# Altium PCB PCB_ETCV1_1.PcbDoc
Units mm, origin at the board's own origin, x right, y up, seen from the top; angles counter-clockwise.
Board outline 48.26 x 48.89 mm, 4 copper layers (Top Layer, Int1, Int2, Bottom Layer), stack 1.369 mm thick; 49 components, 45 nets, 195 pads, 69 vias.
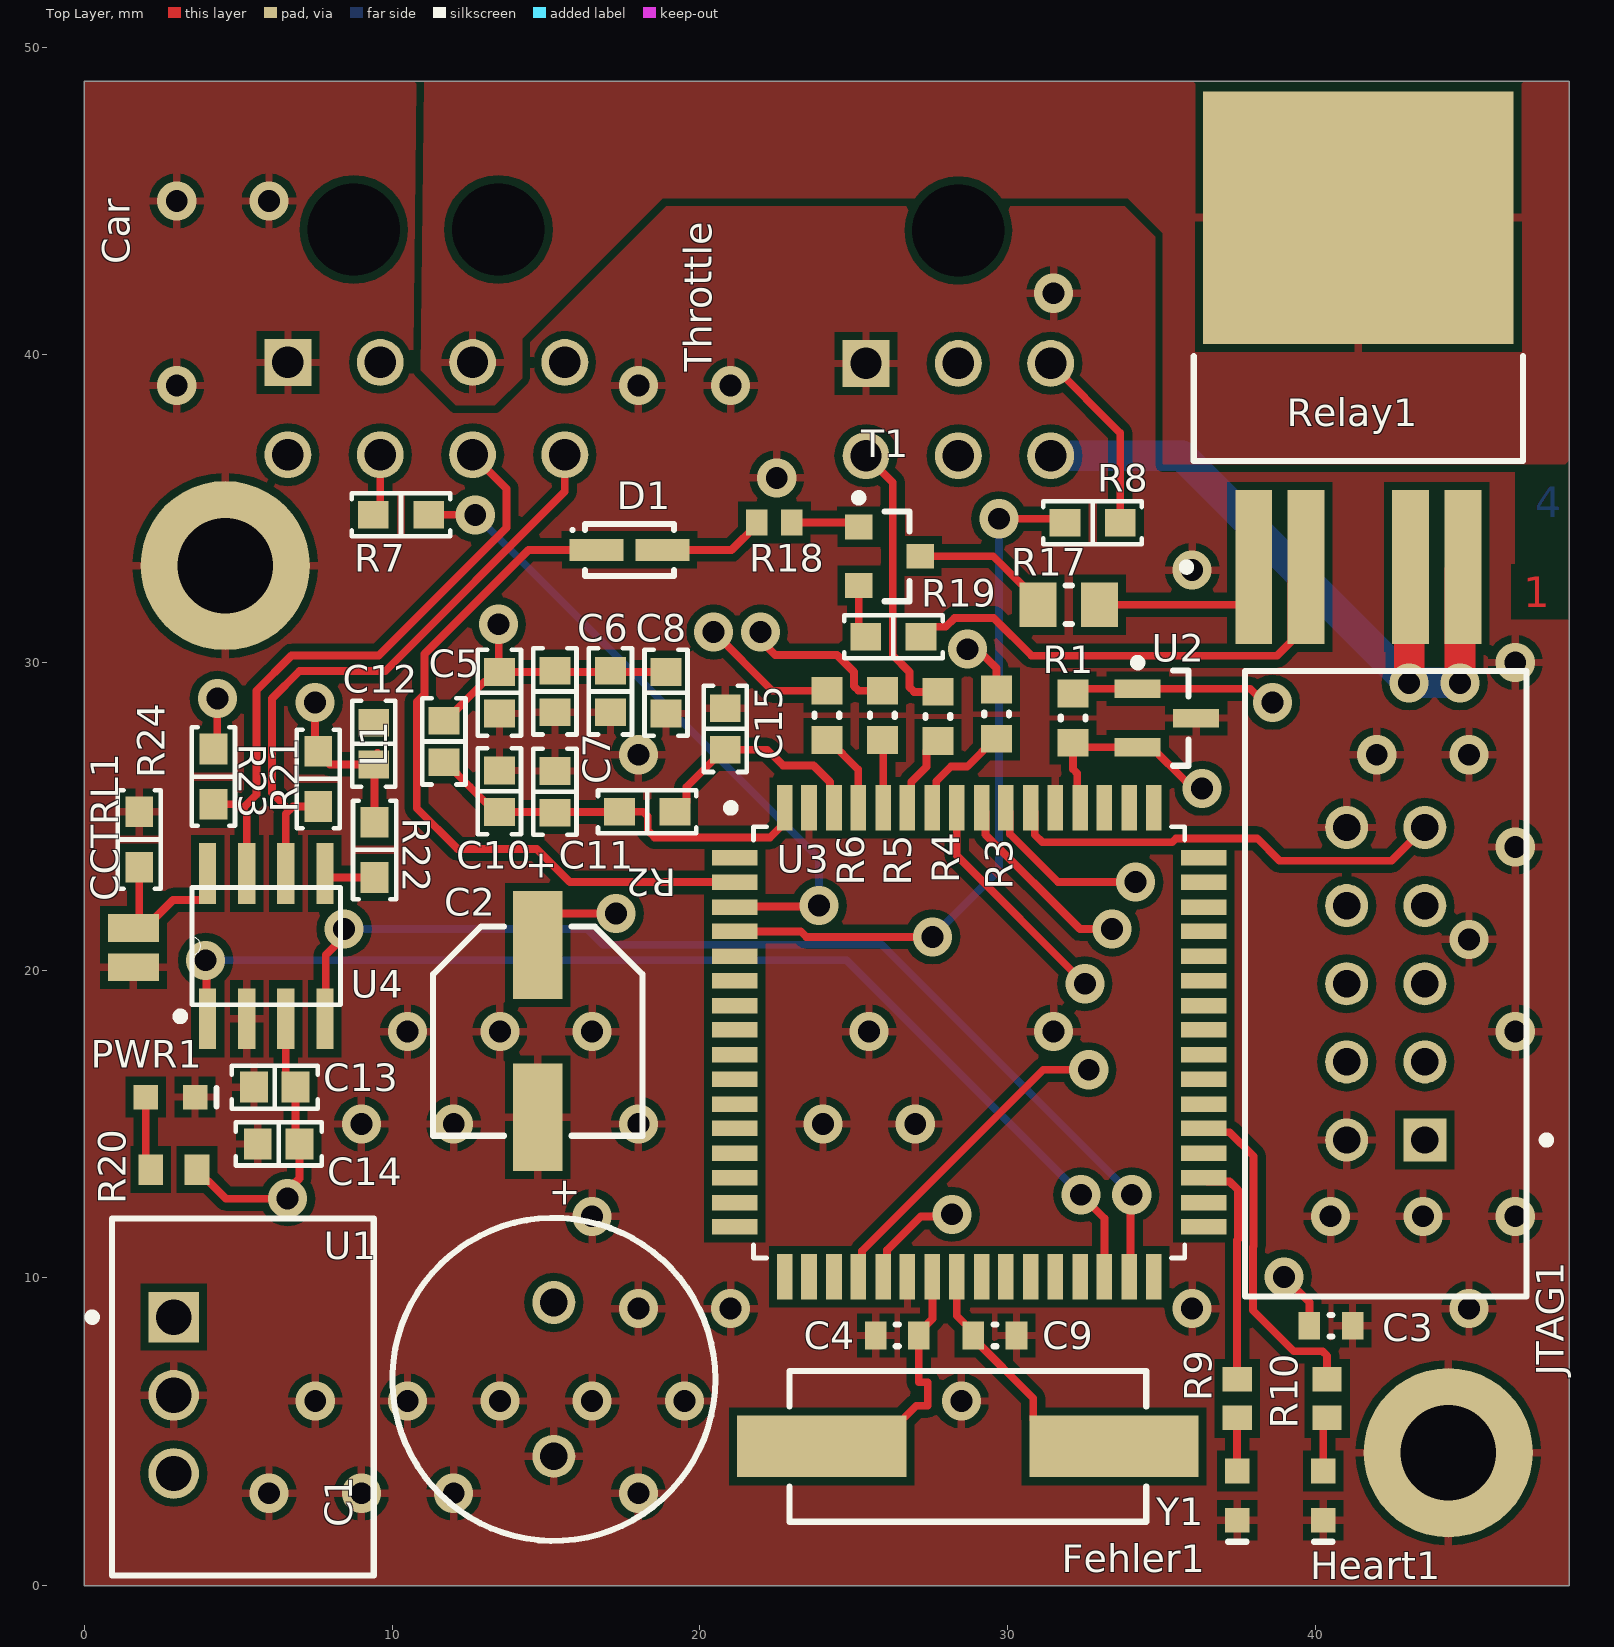
[diagram p0: Top Layer view]
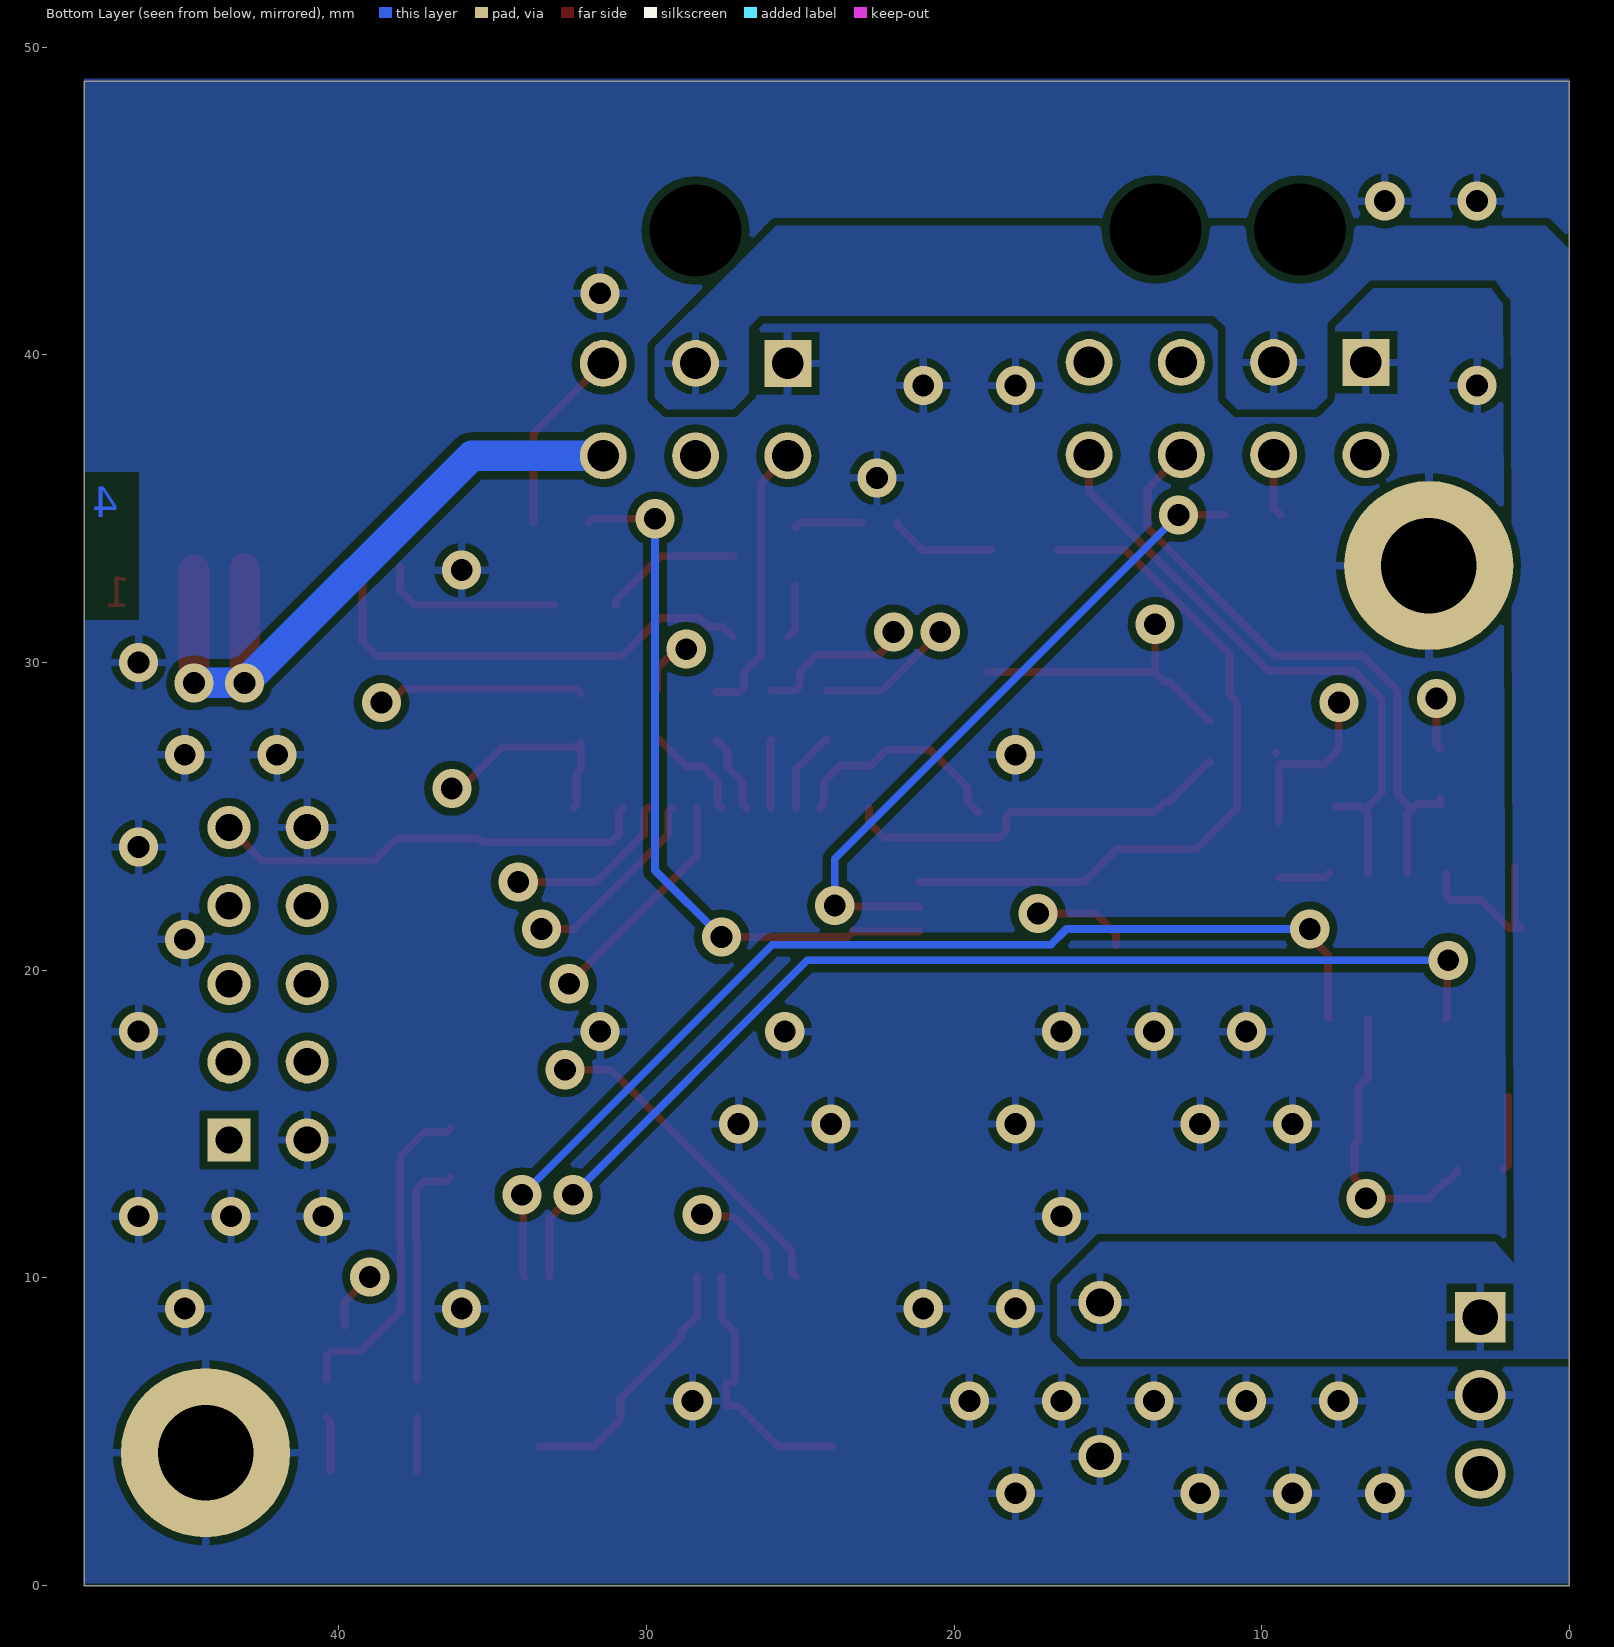
[diagram p1: Bottom Layer view, seen from below]
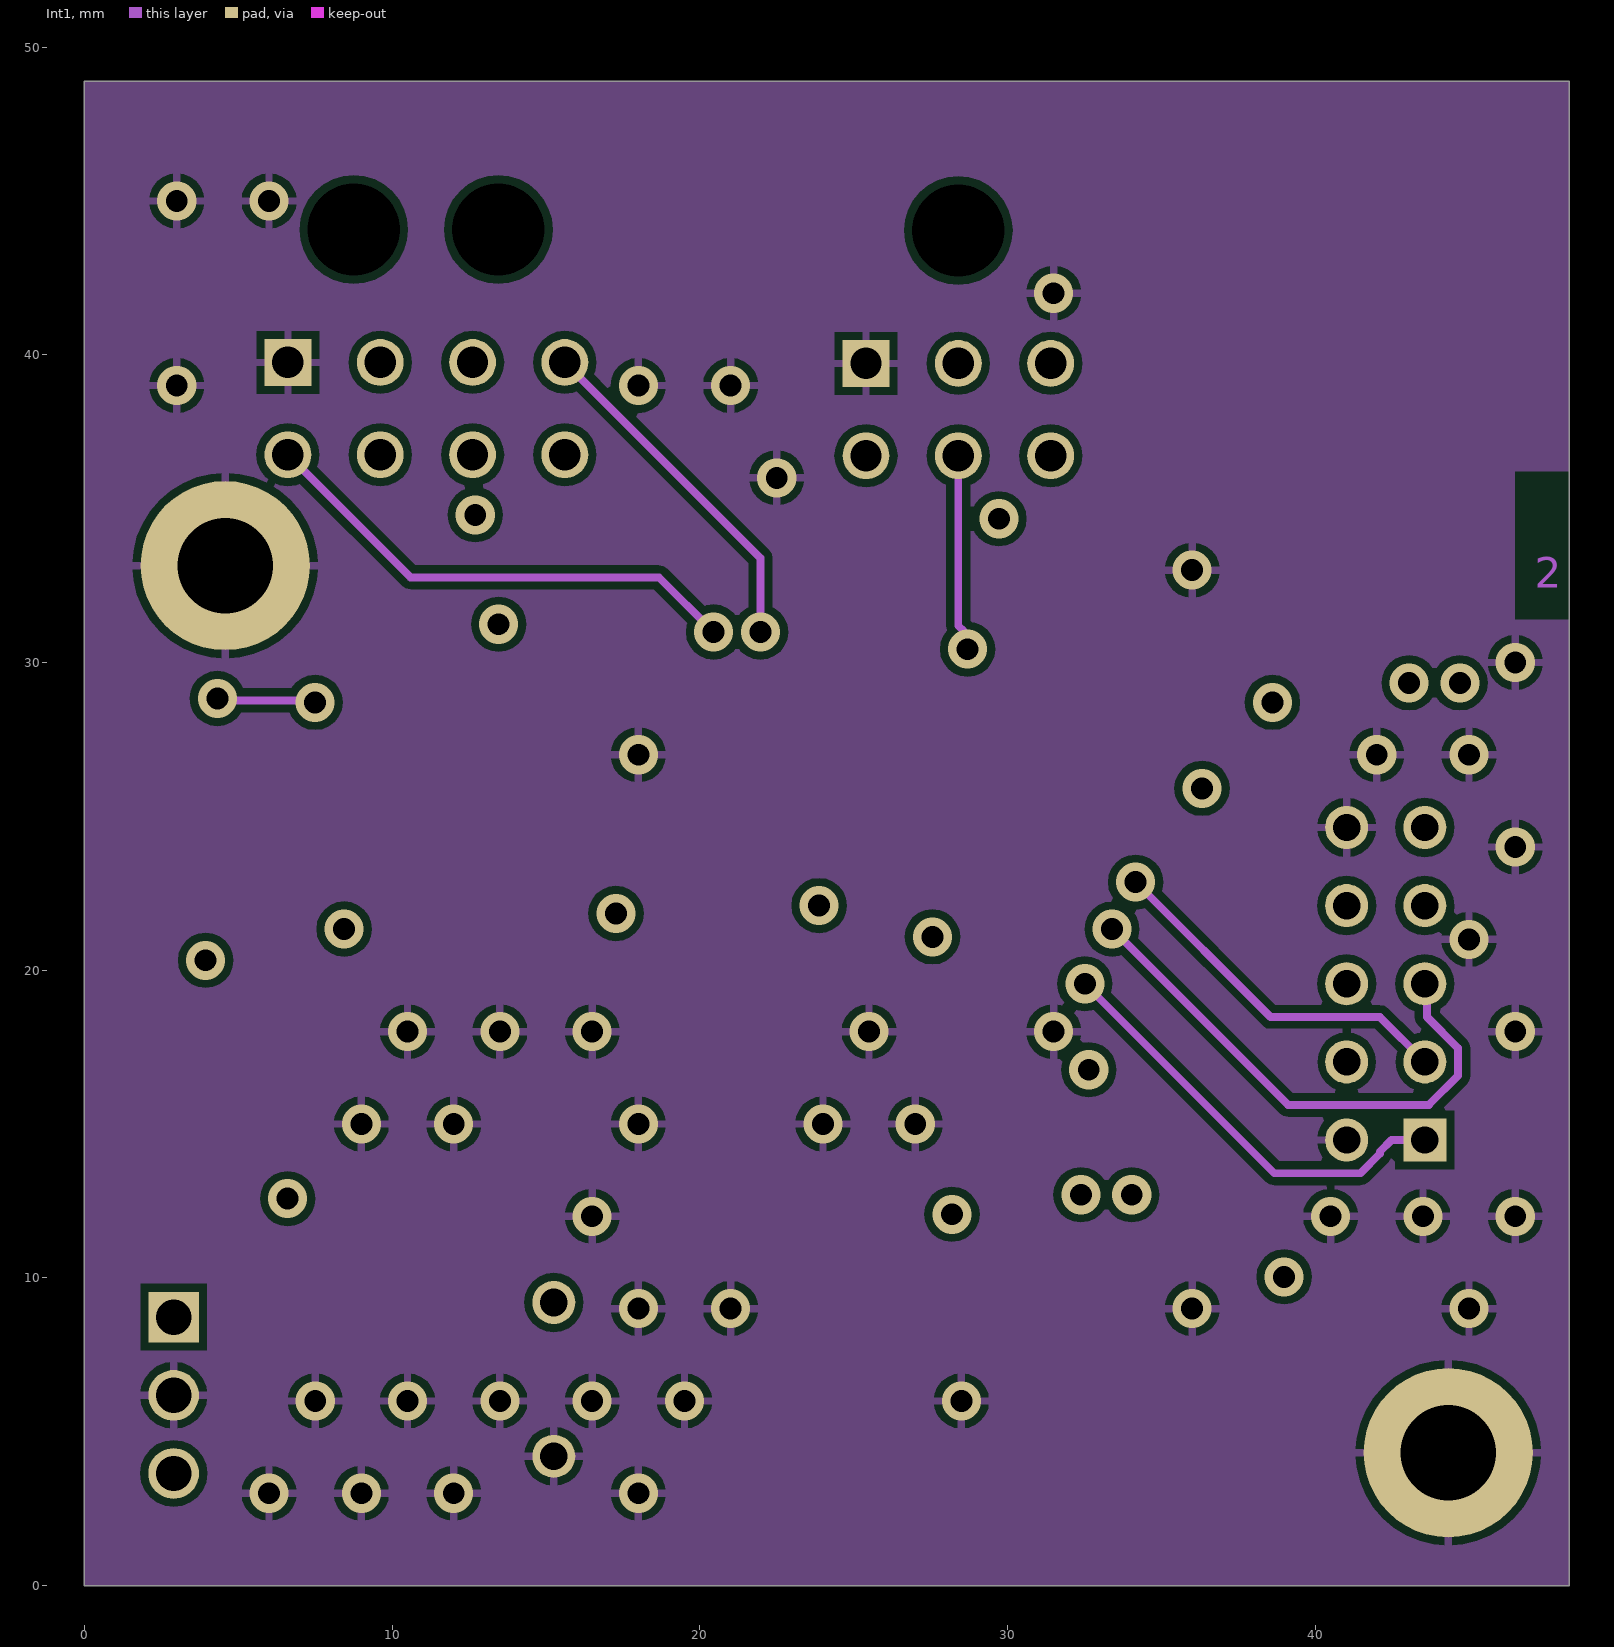
[diagram p2: Int1]
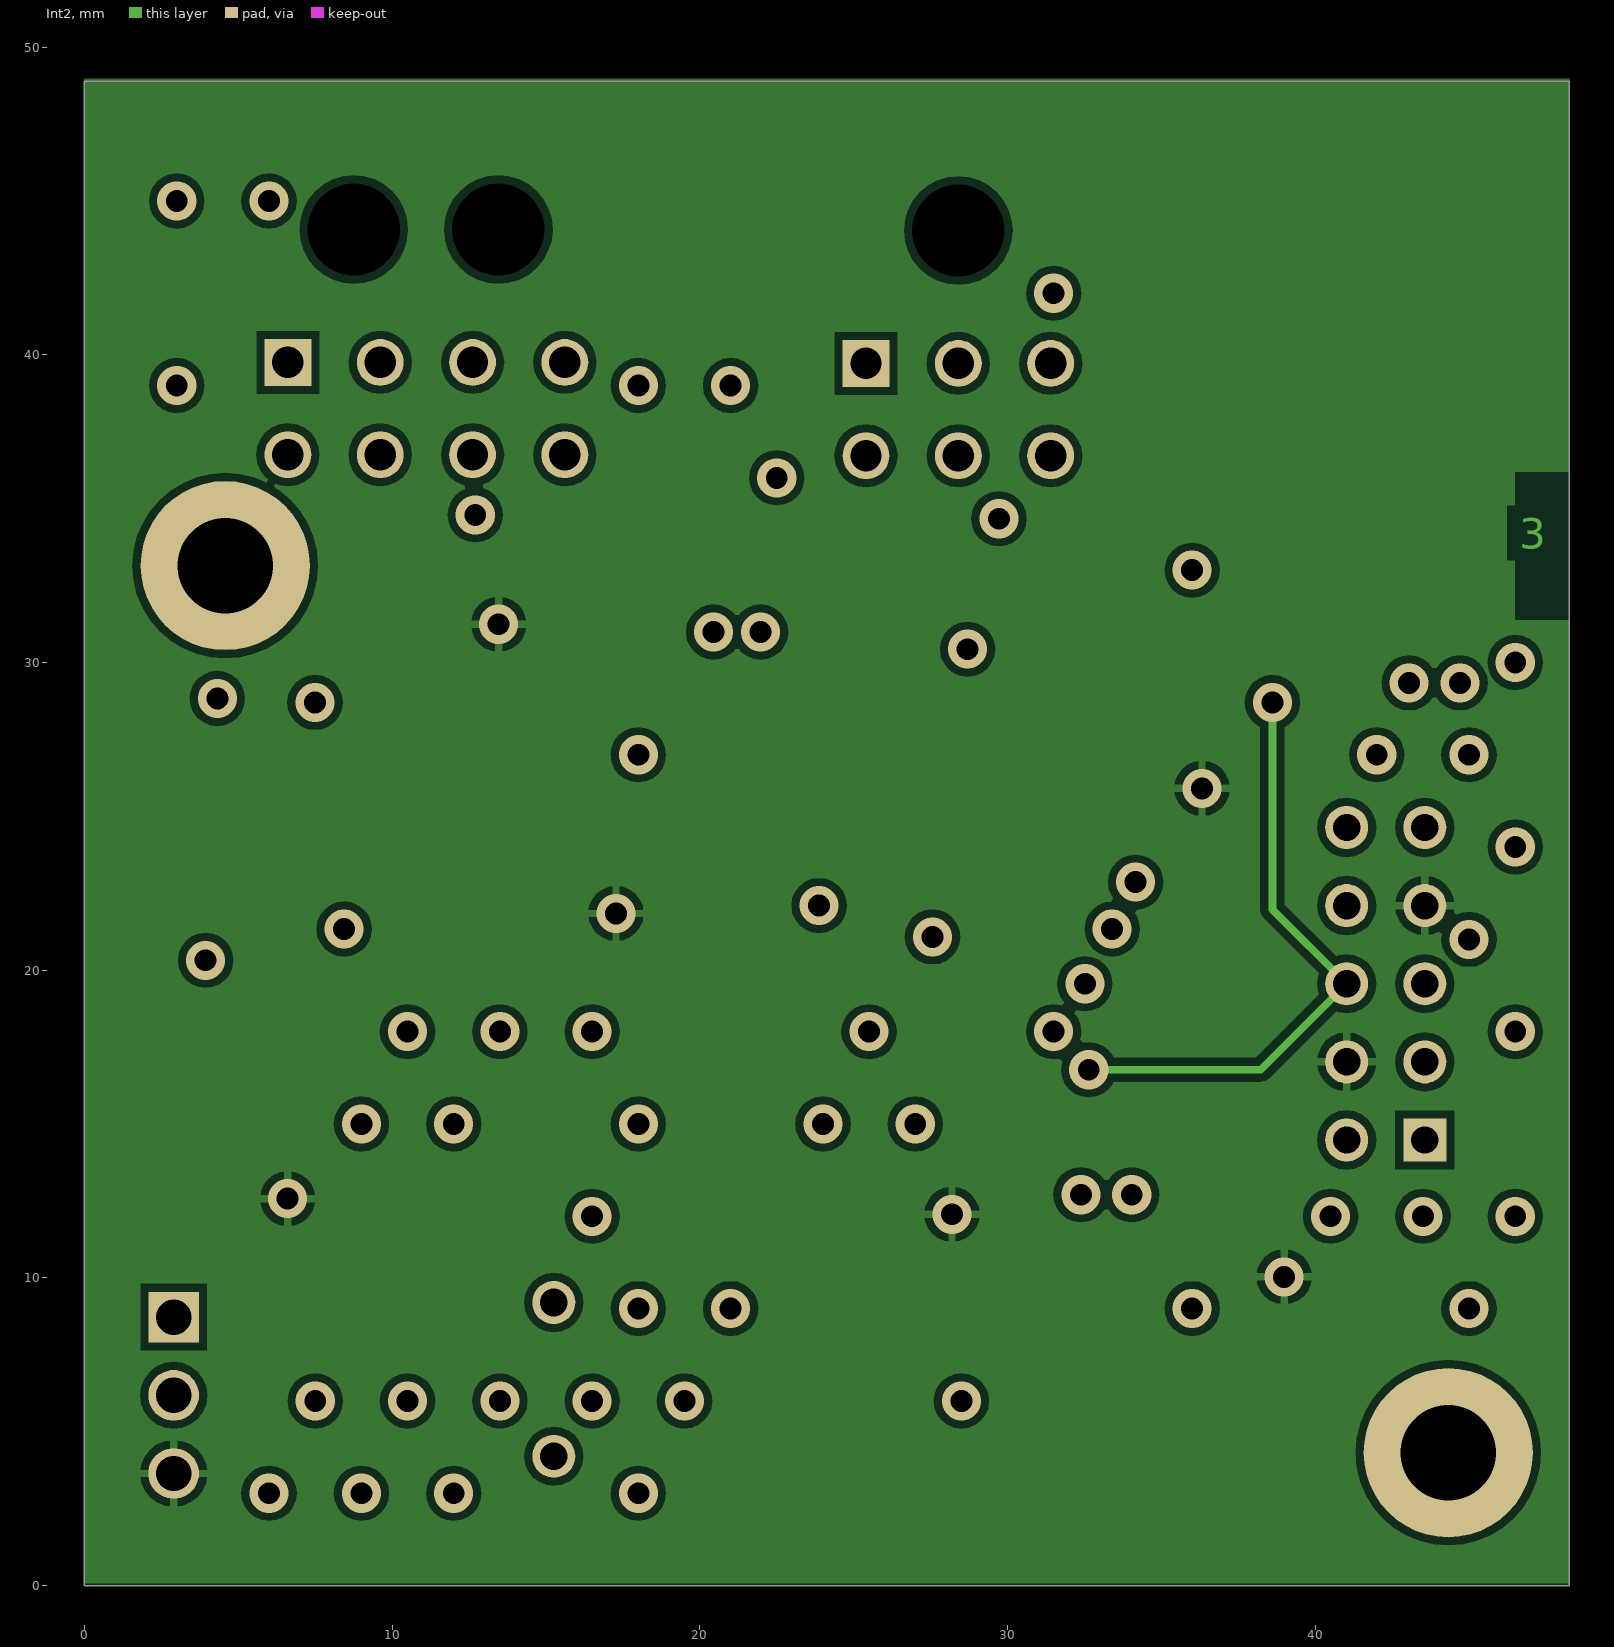
[diagram p3: Int2]
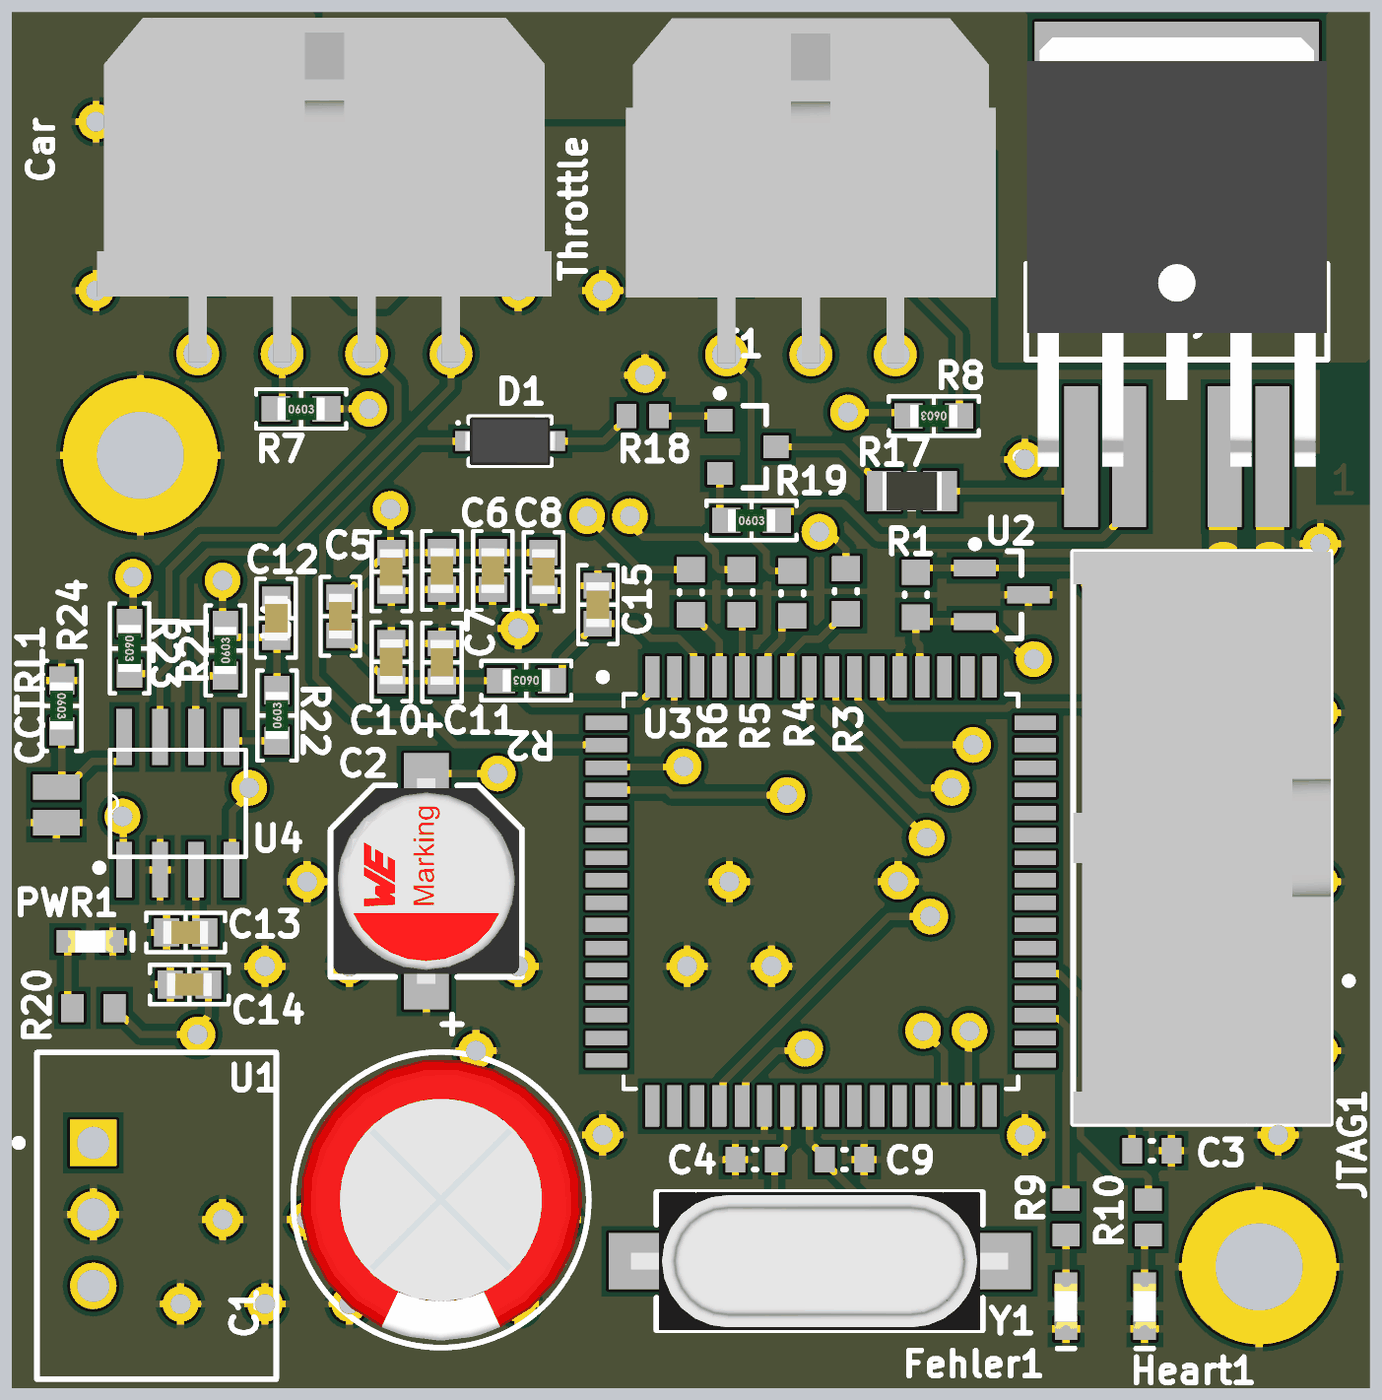
[diagram p4: 3D render of the assembled board from above, using the file's embedded part models]

## Layer stack, top to bottom
Top Solder: solder mask 0.0254, SM-001, Dk 4
Top Layer: signal copper 0.035
Dielectric 1: prepreg 0.1295, PP-017, Dk 4.3
Dielectric 2: prepreg 0.1295, PP-017, Dk 4.3
Int1: signal copper 0.035
Dielectric 3: core 0.7112, Core-039, Dk 4.8
Int2: signal copper 0.035
Dielectric 4: prepreg 0.1295, PP-017, Dk 4.3
Dielectric 5: prepreg 0.1295, PP-017, Dk 4.3
Bottom Layer: signal copper 0.035
Bottom Solder: solder mask 0.0254, SM-001, Dk 4

## Board outline
0,0 0,48.895 48.26,48.895 48.26,0

## Design rules (kind name [scope] priority, off if disabled: settings)
Clearance [All] p1: gap=0.254 ignorepadtopadclearanceinfootprint=FALSE except(0: Arc-Hole Track-Hole SMDPad-Hole THPad-Hole Via-Hole Fill-Hole Poly-Hole Region-Hole Text-Hole)
PolygonConnect [All] p1: connectstyle=Relief reliefconductorwidth=0.254 reliefentries=4 polygonreliefangle="90 Angle" airgapwidth=0.254
RoutingVias [All] p1: holewidth=0.711 width=1.27 viastyle="Through Hole" minholewidth=0.711 minwidth=1.27 maxholewidth=0.711 maxwidth=1.27
SolderMaskExpansion [All] p1: expansion=0.102 istentingtop=FALSE
Width [All] p1: maxlimit=0.254 minlimit=0.254 preferedwidth=0.254
30 further rules are at their usual default settings.

## Components (designator, comment, footprint, x,y, rotation, side; value= is the part's Value field where it differs from the comment)
C1 "220uF, 25V" WCAP-ATET_10x12.5 15.254,6.7 r90 top
C2 "100uF, 10V" WCAP-ASLU_6.3x7.7 14.732,18.018 r90 top
C3 "100nF 0603" CAPC0603(1608)100_L 40.513,8.444 r0 top value=100nF
C4 "16 pF 0603" CAPC0603(1608)100_L 26.416,8.128 r180 top value=100nF
C5 "SMD Capacitor" "CAP 0603/1608" 13.486,29.017 r90 top
C6 "SMD Capacitor" "CAP 0603/1608" 15.291,29.057 r90 top
C7 "SMD Capacitor" "CAP 0603/1608" 17.095,29.057 r90 top
C8 "SMD Capacitor" "CAP 0603/1608" 18.899,29.017 r90 top
C9 "16 pF 0603" CAPC0603(1608)100_L 29.591,8.128 r0 top value=100nF
C10 "SMD Capacitor" "CAP 0603/1608" 13.486,25.813 r90 top
C11 "SMD Capacitor" "CAP 0603/1608" 15.291,25.795 r90 top
C12 "SMD Capacitor" "CAP 0603/1608" 9.398,27.362 r90 top value=4,7u
C13 "SMD Capacitor" "CAP 0603/1608" 6.183,16.199 r0 top
C14 "SMD Capacitor" "CAP 0603/1608" 6.311,14.351 r0 top
C15 "SMD Capacitor" "CAP 0603/1608" 20.828,27.84 r90 top
Car "43045-0800" 43045-0800 11.112,39.751 r180 top
CCTRL1 "SMD Jumper open" SMD-JUMPER-OPEN 1.59,20.733 r90 top
D1 "BAT46WH" DIOM2715X18N 17.712,33.655 r0 top
Fehler1 "150060BS75000" 0603_A 37.463,2.921 r90 top
Heart1 "150060BS75000" 0603_A 40.259,2.921 r90 top
JTAG1 "5103309-1" TECO-5103309-1_V 42.291,19.558 r270 top
L1 "SMD Capacitor" "CAP 0603/1608" 11.682,27.432 r90 top
PWR1 "150060GS75000" 0603_A 2.794,15.875 r180 top
R1 "10k 0603" RESC0603(1608)_N 32.131,28.194 r90 top value="127.00 Ohm"
R2 "SMD Resistor" "STACKPOLE CSR0603" 18.288,25.146 r180 top
R3 "10k 0603" RESC0603(1608)_N 29.644,28.321 r270 top value="127.00 Ohm"
R4 "10k 0603" RESC0603(1608)_N 27.739,28.245 r270 top value="127.00 Ohm"
R5 "10k 0603" RESC0603(1608)_N 25.934,28.283 r270 top value="127.00 Ohm"
R6 "10k 0603" RESC0603(1608)_N 24.13,28.283 r270 top value="127.00 Ohm"
R7 "SMD Resistor" "STACKPOLE CSR0603" 10.287,34.798 r0 top value=5k
R8 "SMD Resistor" "STACKPOLE CSR0603" 32.766,34.544 r180 top value=5k
R9 "CRCW0603130KFKEA" RESC1609X50X30NL10T20 37.463,6.075 r270 top
R10 "CRCW0603130KFKEA" RESC1609X50X30NL10T20 40.386,6.075 r270 top
R17 "RC0805FR-071KL" RESC2013X60X35ML10T20 31.988,31.877 r0 top
R18 "CRCW060330K0FKEA" RESC1609X50X30LL10T20 22.419,34.544 r0 top
R19 "SMD Resistor" "STACKPOLE CSR0603" 26.289,30.837 r0 top value="510 0603"
R20 "RC0603FR-07100RL" RESC1608X55X25ML10T15 2.907,13.515 r180 top
R21 "SMD Resistor" "STACKPOLE CSR0603" 7.594,26.217 r90 top value="60 0603"
R22 "SMD Resistor" "STACKPOLE CSR0603" 9.427,23.908 r90 top value="300 0603"
R23 "SMD Resistor" "STACKPOLE CSR0603" 4.191,26.289 r270 top value="60 0603"
R24 "SMD Resistor" "STACKPOLE CSR0603" 1.778,24.246 r270 top
Relay1 "AUIR3313S" "D2PAK5 ;DPAK228P1524X483-5N" 41.402,40.25 r90 top
T1 "BC848BLT1G" ONSC-SOT-23-3-318-08_V 26.162,33.452 r0 top
Throttle "43045-0600" 43045-0600 28.4,39.719 r180 top
U1 "R-78E5.0-0.5" REPO-R-78E-0.5-3_V 2.9,6.181 r270 top
U2 "MCP120T-300I/TT" SOT-23-TT3_N 35.179,28.194 r0 top
U3 "AT90CAN128-16AI" *QFP80P1600X1600X120-64N 28.753,17.653 r0 top
U4 "MCP2551/2561" *SOIC127P600X175-8N 5.908,20.783 r90 top
Y1 "16MHz, +/-30ppm, 16pF" WE-XTAL_HC49/4HSMX 28.709,4.52 r0 top

## Footprints (in the part's own frame and the unit in brackets; to place one, negate y for a bottom-side part, rotate by r counter-clockwise, add the part's x,y. Pads: shape width x height; smd on the part's side, far side on the other; paste and mask are expansions set on the pad)
0603_A [mm] "Chip LED, 2-Leads, Body 1.6x0.8mm, IPC Medium Density"
  rect 0.8x0.8 smd: 1(-0.8,0) 2(0.8,0)
  silkscreen extent -1.5,-0.3 -1.5,0.3, body extent -0.8,-0.4 0.8,0.4, height 0.7
43045-0600 [mm] "Micro-Fit 3.0 Right Angle Header, 3.00mm Pitch, Dual Row, 6 Circuits"
  rect 1.524x1.524 hole 1.02: 1(3,0)
  round 1.524 hole 1.02: 2(0,0) 3(-3,0) 4(3,3) 5(0,3) 6(-3,3)
  round 0 hole 3 unplated: ""(0,-4.32)
  body extent -6.57,-8.95 6.57,3.29, height 8.83
43045-0800 [mm] "Micro-Fit 3.0 Right Angle Header, 3.00mm Pitch, Dual Row, 8 Circuits"
  rect 1.524x1.524 hole 1.02: 1(4.5,0)
  round 1.524 hole 1.02: 2(1.5,0) 3(-1.5,0) 4(-4.5,0) 5(4.5,3) 6(1.5,3) 7(-1.5,3) 8(-4.5,3)
  round 0 hole 3 unplated: ""(-2.34,-4.32) ""(2.36,-4.32)
  body extent -8.08,-8.95 8.08,3.29, height 8.83
*QFP80P1600X1600X120-64N [mil]
  rect 58x20 smd: 1(-300,236) 2(-300,205) 3(-300,173) 4(-300,142) 5(-300,110) 6(-300,79) 7(-300,47) 8(-300,16) 9(-300,-16) 10(-300,-47) 11(-300,-79) 12(-300,-110) 13(-300,-142) 14(-300,-173) 15(-300,-205) 16(-300,-236) 33(300,-236) 34(300,-205) 35(300,-173) 36(300,-142) 37(300,-110) 38(300,-79) 39(300,-47) 40(300,-16) 41(300,16) 42(300,47) 43(300,79) 44(300,110) 45(300,142) 46(300,173) 47(300,205) 48(300,236)
  rect 20x58 smd: 17(-236,-300) 18(-205,-300) 19(-173,-300) 20(-142,-300) 21(-110,-300) 22(-79,-300) 23(-47,-300) 24(-16,-300) 25(16,-300) 26(47,-300) 27(79,-300) 28(110,-300) 29(142,-300) 30(173,-300) 31(205,-300) 32(236,-300) 49(236,300) 50(205,300) 51(173,300) 52(142,300) 53(110,300) 54(79,300) 55(47,300) 56(16,300) 57(-16,300) 58(-47,300) 59(-79,300) 60(-110,300) 61(-142,300) 62(-173,300) 63(-205,300) 64(-236,300)
  silkscreen extent -310,-276 276,305, body extent -270,-270 270,270, height 30
*SOIC127P600X175-8N [mil]
  rect 78x22 smd: 1(-93,75) 2(-93,25) 3(-93,-25) 4(-93,-75) 5(93,-75) 6(93,-25) 7(93,25) 8(93,75)
  silkscreen extent -95,-95 75,115, body extent -75,-95 75,95, height 80
"CAP 0603/1608" [mm] "Chip Capacitor, 2-Leads, Body 1.60x0.80mm, IPC Medium Density"
  rect 0.9x1 smd: 1(-0.675,0) 2(0.675,0)
  silkscreen extent -1.4,-0.7 1.4,0.7, body extent -0.8,-0.41 0.8,0.41, height 0.82
CAPC0603(1608)100_L [mm] "Chip Capacitor, Body 1.6x0.8mm, Height 1.0mm, IPC High Density"
  rect 0.7x0.9 smd: 1(-0.7,0) 2(0.7,0)
  silkscreen extent -0.05,-0.35 0.05,0.35, body extent -0.87,-0.47 0.88,0.48, height 1
"D2PAK5 ;DPAK228P1524X483-5N" [mm] "D2-PAK, 5-Pads, Body 7,93x8,70mm (max), IPC Medium Density"
  rect 5x1.2 smd: 1(-7.15,3.4) 2(-7.15,1.7) 4(-7.15,-1.7) 5(-7.15,-3.4)
  rect 8.2x10.1 smd: 3(4.2,0)
  silkscreen extent -7.27,-5.35 -0.3,5.71, body extent -7.51,-5.33 7.74,5.33, height 4.83
DIOM2715X18N [mm] "Molded Diode, 2-Leads, Body 2,70x1,55mm, IPC Medium Density"
  rect 1.75x0.7 smd: 1(-1.075,0) 2(1.075,0)
  silkscreen extent -1.9,-0.85 1.45,0.85, body extent -1.65,-0.85 1.65,0.85, height 1.8
ONSC-SOT-23-3-318-08_V [mm] "SOT23, 3-Leads, Body 2.92x1.3mm, Pitch 0.95mm"
  rect 0.9x0.8 smd: 1(-1,0.95) 2(-1,-0.95) 3(1,0)
  silkscreen extent -1.12,-1.46 0.65,2.02, body extent -0.65,-1.46 0.65,1.46, height 1.11
REPO-R-78E-0.5-3_V [mm] "THD, 3-Leads, Body 11.6x8.5mm, Pitch 2.54mm"
  rect 1.65x1.65 hole 1.15: 1(-2.54,0)
  round 1.65 hole 1.15: 2(0,0) 3(2.54,0)
  silkscreen extent -5.75,-2.77 5.85,6.5, body extent -5.75,-2 5.85,6.5, height 10.4
RESC0603(1608)_N [mm] "Chip Resistor, Body 1.6x0.8mm, IPC Medium Density"
  rect 0.9x1 smd: 1(-0.8,0) 2(0.8,0)
  silkscreen extent -0.05,-0.4 0.05,0.4, body extent -0.85,-0.47 0.85,0.47, height 0.6
RESC1608X55X25ML10T15 [mm] "Chip Resistor, 2-Leads, Body 1.60x0.80mm, IPC Low Density"
  rect 0.8x1 smd: 1(-0.75,0) 2(0.75,0)
  body extent -0.85,-0.45 0.85,0.45, height 0.55
RESC1609X50X30LL10T20 [mm] "Chip Resistor, 2-Leads, Body 1.55x0.85mm, IPC High Density"
  rect 0.7x0.85 smd: 1(-0.575,0) 2(0.575,0)
  body extent -0.82,-0.48 0.82,0.48, height 0.5
RESC1609X50X30NL10T20 [mm] "Chip Resistor, 2-Leads, Body 1.55x0.85mm, IPC Medium Density"
  rect 0.8x0.95 smd: 1(-0.625,0) 2(0.625,0)
  body extent -0.82,-0.48 0.82,0.48, height 0.5
RESC2013X60X35ML10T20 [mm] "Chip Resistor, 2-Leads, Body 2.1x1.35mm, IPC Low Density"
  rect 1.2x1.45 smd: 1(-1,0) 2(1,0)
  silkscreen extent -0.1,-0.63 0.1,0.63, body extent -1.05,-0.68 1.05,0.67, height 0.6
SMD-JUMPER-OPEN [mm] "Jumper, SMD"
  rect 0.9x1.65 smd: 1(-0.635,0) 2(0.635,0)
SOT-23-TT3_N [mm] "SOT23, 3-Leads, Body 2.9x1.3mm, Pitch 0.95mm, Lead Span 2.4mm, IPC Medium Density"
  rect 1.5x0.6 smd: 1(-0.95,0.95) 2(-0.95,-0.95) 3(0.95,0)
  silkscreen extent -1.07,-1.55 0.7,1.92, body extent -0.7,-1.52 0.7,1.53, height 1.12
"STACKPOLE CSR0603" [mm] "Chip Resistor, 2-Leads, Body 1.60x0.80mm, IPC Medium Density"
  rect 1x0.9 smd: 1(-0.9,0) 2(0.9,0)
  silkscreen extent -1.6,-0.7 1.6,0.7, body extent -0.85,-0.4 0.85,0.4, height 0.45
TECO-5103309-1_V [mm] "Male Header, 10-Leads, Body 20.32x9.144mm, Pitch 2.54mm"
  rect 1.4x1.4 hole 0.889: 1(5.08,1.27)
  round 1.4 hole 0.889: 2(5.08,-1.27) 3(2.54,1.27) 4(2.54,-1.27) 5(0,1.27) 6(0,-1.27) 7(-2.54,1.27) 8(-2.54,-1.27) 9(-5.08,1.27) 10(-5.08,-1.27)
  silkscreen extent -10.16,-4.57 10.16,5.35, body extent -10.16,-4.57 10.16,4.57, height 9.85
WCAP-ASLU_6.3x7.7 [mm] "Aluminum Electrolytic Capacitors, body diameter 6.3mm"
  rect 3.5x1.6 smd: 1(-2.8,0) 2(2.8,0)
  silkscreen extent -3.4,-3.4 3.4,3.4, body extent -3.65,-3.3 3.65,3.3, height 7.7
WCAP-ATET_10x12.5 [mm] "Aluminum Electrolytic Capacitors, 10x12.5mm"
  round 1.4 hole 0.9: 1(-2.5,0) 2(2.5,0)
  silkscreen extent -5.25,-5.25 5.25,5.25, body extent -4.99,-5 5,5, height 12.76
WE-XTAL_HC49/4HSMX [mm] "Quartz Crystal, size HC49/4HSMX, body 11.4x4.9mm"
  rect 5.5x2 smd: 1(-4.75,0) 2(4.75,0)
  silkscreen extent -5.8,-2.45 5.8,2.45, body extent -6.7,-2.45 6.7,2.45, height 4.3

## Part data
C1: library part 860130475006, "WCAP-ATET THT Aluminum Electrolytic Capacitors, D10mm x L12.5mm, 220uF, +/-20%, 25VDC", Capacitance=220uF, Capacitance Tolerance=+/-20%, Leakage Current=55uA, Operating Temperature="-40 to +125degC", Rated Voltage=25VDC, Ripple Current max.=420mA, ComponentLink1Description=Manufacturer, ComponentLink1URL=http://www.we-online.de, ComponentLink2Description=Datasheet, ComponentLink2URL=https://katalog.we-online.com/pbs/datasheet/860130475006.pdf, Diameter=10mm, Dissipation Factor=13%, Endurance=2000h, Length=12.5mm, Mounting Technology=THT, Packaging="Ammo Pack", Part Number=860130475006, Published Date="August 2019", Publisher="Wurth Elektronik", Technical Reference=ATGF125221M025DSPA9B000
C2: library part 865090245005, "WCAP-ASLU Aluminium Electrolytic Capacitors, D6.3mm x L7.7mm, 100uF, +/-20%, 10VDC", Capacitance=100uF, Capacitance Tolerance=+/-20%, Leakage Current=2uA, Operating Temperature="-40 to +85degC", Rated Voltage=10VDC, Ripple Current max.=75mA, ComponentLink1Description=Manufacturer, ComponentLink1URL=http://www.we-online.de, ComponentLink2Description=Datasheet, ComponentLink2URL=https://katalog.we-online.com/pbs/datasheet/865090245005.pdf, Diameter=6.3mm, Dissipation Factor=22%, Endurance=1000h, Length=7.7mm, Mounting Technology=SMD, Packaging="Tape and Reel", Part Number=865090245005, Published Date="August 2019", Publisher="Wurth Elektronik", Technical Reference=ASBD077101M010DVCTCA000
C3 C4 C9: library part CMP-1035-02579-1, "CAP 100nF 10V ±5% 0603 (1608 Metric) Thickness 1mm SMD", Case-EIA=0603, Case-Metric=1608, Rated Voltage="10 V", Tolerance=Â±5%, Max Thickness="1 mm", Technology=SMT
C5 C6 C7 C8 C10 C11 C12 C13 C14 C15 L1: "Capacitor with multiple Footprints"
Car: library part "MicroFit3.0 8-Pin", "Molex Micro-Fit 3.0 8-Pin / 600V / 8.5A"
Fehler1 Heart1: library part CMP-1426-00003-1, "SMD mono-color Chip LED, WL-SMCW, Blue", Color=Blue, Manufacturer="Wuerth Elektronik", ComponentLink1Description="Manufacturer URL", ComponentLink1URL=http://www.we-online.com, ComponentLink2Description=Datasheet, ComponentLink2URL=http://katalog.we-online.com/led/datasheet/150060BS75000.pdf, PackageReference=0603_A, PartNumber=150060BS75000
JTAG1: library part CMP-2000-07502-1, "Male Header, Pitch 2.54 mm, 2 x 5 Position, Height 9.855 mm, Tail Length 3.048 mm, -65 to 105 degC, RoHS, Tube", Colour=Black, Current Rating=1A, Flammability Rating=UL94V-0, Insulation Resistance=5GR, Manufacturer="TE Connectivity", Max Operating Temperature=105degC, Min Operating Temperature=-65degC, Package Description="Male Header, Pitch 2.54 mm, 2 x 5 Position, Height 9.855 mm, Tail Length 3.048 mm", Package Quantity=35, Board Standoff=Yes(With), Body Material=Thermoplastic, Connector System=Wire-to-Board, Connector Type=Header, Contact Gender=Male, Contact Material=CopperAlloy, Contact Mating Length=0.24inch, Contact Plating=Gold, Contact Shape=Square, Datasheet URL=http://www.te.com/commerce/DocumentDelivery/DDEController?Action=showdoc&DocId=Customer+Drawing%7F5103309%7FE1%7Fpdf%7FEnglish%7FENG_CD_5103309_E1.pdf%7F5103309-1, Datasheet Version="Rev. E1, 03/2011", Depth=9.14mm, ELV=Compliant, Gender=Male, Height=8.813mm, Housing Colour=Black, Housing Material=PBT, Lead Free=LeadFree, Length=0.8inch, Manufacturer URL=http://www.te.com/, Mating Alignment=Yes(With), Mating Connector Lock=No(Without), Mating Retention=No(Without), Max Current Rating=1A, Mount=ThroughHole, Mounting Technology=ThroughHole, Number of Contacts=10, Number of Positions=10, Number of Rows=2, Orientation=Straight, Package Reference=5103309-1, Packaging=Rail/Tube, Panel Mount Retention=No(Without), PCB Mount Alignment=No(Without), PCB Mount Retention=Without, PCB Mounting Orientation=Vertical, Pitch=2.54mm, REACH SVHC=NoSVHC, RoHSCompliant=True, Row Spacing=2.54mm, Shrouded=Yes(With), Shrouded End Dimension=3.81mm, Termination=ThroughHole, Termination Post Length=0.12inch
PWR1: library part CMP-1426-00002-1, "SMD mono-color Chip LED, WL-SMCW, Green", Color=Green, Manufacturer="Wuerth Elektronik", ComponentLink1Description="Manufacturer URL", ComponentLink1URL=http://www.we-online.com, ComponentLink2Description=Datasheet, ComponentLink2URL=http://katalog.we-online.com/led/datasheet/150060GS75000.pdf, PackageReference=0603_A, PartNumber=150060GS75000
R1 R3 R4 R5 R6: library part CMP-1012-00408-1, "127R 0.1W 1% 0603 (1608 Metric)  SMD", Case-EIA=0603, Case-Metric=1608, Power="0.1 W", Tolerance="1 %", Technology=SMT
R2 R7 R8 R19 R21 R22 R23 R24: "Resistor with multiple footprints"
R9 R10: library part CMP-2000-03887-1, Manufacturer="Vishay Dale", Part Number=CRCW0603130KFKEA
R17: library part CMP-2100-03671-1, "Chip Resistor, 1 KOhm, +/- 1%, 125 mW, -55 to 155 degC, 0805 (2012 Metric), RoHS, Tape and Reel", Case Code (Imperial)=0805, Case Code (Metric)=2012, Manufacturer=Yageo, Max Operating Temperature=155degC, Max Power Dissipation=125mW, Min Operating Temperature=-55degC, Package Description="2-Pin Surface Mounted Device, Body 2 x 1.25 mm", Package Quantity=1, Resistance=1KOhm, Temperature Coefficient=100ppm/degreesC, Tolerance=1%, Voltage Rating=150V, Case/Package=0805, Composition=ThickFilm, Datasheet URL=http://www.yageo.com/NewPortal/yageodocoutput?fileName=/pdf/R-Chip/PYu-RC_Group_51_RoHS_L_5.pdf, Datasheet Version="Rev. 5, 10/2016", Depth=1.25mm, Height=0.024inch, Lead Free=LeadFree, Length=0.079inch, Manufacturer URL=http://www.yageo.com/, Military Standard=Not, Number of Pins=2, Number of Terminations=2, Package Reference=0805, Packaging=TapeandReel, Power Rating=125mW, REACH SVHC=Unknown, RoHSCompliant=true, Termination=SMD/SMT, Voltage Rating (DC)=150V, Width=0.049inch
R18: library part CMP-2000-03223-1, Manufacturer="Vishay Dale", Part Number=CRCW060330K0FKEA
R20: library part CMP-2100-03663-1, "Chip Resistor, 100 Ohm, +/- 1%, 0.1 W, -55 to 155 degC, 0603 (1608 Metric), RoHS, Tape and Reel", Case Code (Imperial)=0603, Case Code (Metric)=1608, Manufacturer=Yageo, Max Operating Temperature=155degC, Min Operating Temperature=-55degC, Package Description="2-Pin Surface Mount Device, Body 1.6 x 0.8 mm", Power Rating=100mW, Resistance=100Ohm, Temperature Coefficient=100ppm/degreesC, Tolerance=1%, Voltage Rating=50V, Case/Package=0603, Composition=ThickFilm, Datasheet URL=http://www.yageo.com/NewPortal/yageodocoutput?fileName=/pdf/R-Chip/PYu-RC_Group_51_RoHS_L_5.pdf, Datasheet Version="Rev. 5, 10/2016", Depth=0.8mm, Height=0.45mm, Lead Free=LeadFree, Length=1.6mm, Manufacturer URL=http://www.yageo.com/, Military Standard=Not, Number of Pins=2, Package Reference=0603, Packaging=TapeandReel, REACH SVHC=Unknown, RoHSCompliant=true, Termination=SMD/SMT, Voltage Rating (DC)=50V, Width=0.8mm
T1: library part CMP-1048-00679-1, "General Purpose Transistor, NPN Silicon, 3-Pin SOT-23, Pb-Free, Tape and Reel", Manufacturer="On Semiconductor", ComponentLink1Description="Manufacturer URL", ComponentLink1URL=http://www.onsemi.com/, ComponentLink2Description=Datasheet, ComponentLink2URL=http://www.onsemi.cn/pub_link/Collateral/BC846ALT1-D.PDF, ComponentLink3Description="Package Specification", ComponentLink3URL=http://www.onsemi.cn/pub_link/Collateral/318-08.PDF, DatasheetVersion="Rev. 11", fT Min (MHz)=100, IC Continuous (A)=0.1, Mounting Technology="Surface Mount", PackageDescription="3-Pin Small Outline Transistor, Body 2.92 x 1.3 mm, Pitch 0.95 mm", PackageReference=SOT-23-3-318-08, PackageVersion="Rev. AP, 11/2009", Packing="Tape and Reel", PartNumber=BC848BLT1G, Polarity=NPN, RoHS=TRUE
Throttle: library part "MicroFit3.0 6-Pin", "Molex Micro-Fit 3.0 6-Pin / 600V / 8.5A"
U1: library part CMP-2000-06922-2, "DC/DC-Converter, 5 V Single Output, 500 mA, -40 to 85 degC, 3-Pin THD, RoHS, Tube", Current - Output (Max)=500mA, Manufacturer="Recom Power", Operating Temperature=-40°C~85°C, Package Description="3-Pin Through Hole Device, Body 11.6 x 8.5 mm, Pitch 2.54 mm", Package Reference="SIP Module", Package Version="Rev. 0", Datasheet URL=http://www.recom-power.com/pdf/Innoline/R-78Exx-0.5.pdf, Datasheet Version=01/2017, Efficiency=92%, Manufacturer URL=http://www.recom-power.com/us/americas/home.html, Mounting Technology=ThroughHole, Number of Outputs=1, Packaging=Tube, VIN Max=28V, VIN Min=7V, VOUT=5V
U2: library part CMP-0138-00362-1, "Microcontroller Supervisory Circuit with Open Drain Output, 3-Pin SOT-23, Industrial Temperature, Tape and Reel", Code_IPC=SOT23-3, DatasheetVersion="revD, 2001", PackageDescription="3-Lead Plastic Small Outline Transistor (TT) [SOT-23]", PackageReference=SOT-23-TT3, PackageVersion="revBB, Aug-2009"
U3: "Ic Mcu 8bit 128kb Flash 64tqfp", Package="TQFP-64 Microchip", Availability=Unavailable, MF=Microchip, MP=AT90CAN128-16AI, Price=None, SnapEDA_Link=https://www.snapeda.com/parts/AT90CAN128-16AI/Microchip/view-part/?ref=snap
U4: library part MCP2551-I/SN, "MCP2551 Series 5.5 V 1 Mb/s Surface Mount High-Speed CAN Transceiver - SOIC-8", Package="SOIC-8 Microchip", Availability=Unavailable, MF=Microchip, MP=MCP2551-I/SN, Price=None, SnapEDA_Link=https://www.snapeda.com/parts/MCP2551-I/SN/Microchip/view-part/?ref=snap
Y1: library part 830003237, "WE-XTAL Quartz Crystal, size HC49-4HSMX, 16MHz, +/-30ppm, 16pF", Frequency=16MHz, Frequency Stability=50ppm, Frequency Tolerance=+/-30ppm, Load Capacitance=16pF, Operating Temperature="-10 up to +60degC", ComponentLink1Description=Manufacturer, ComponentLink1URL=http://www.we-online.de, ComponentLink2Description=Datasheet, ComponentLink2URL=https://katalog.we-online.com/pbs/datasheet/830003237.pdf, Mounting Technology=SMT, Packaging="Tape and Reel", Part Number=830003237, Published Date="March 2019", Publisher="Wurth Elektronik", Size=HC49-4HSMX

## Free pads (board coordinates)
  round 5.5 hole 3.1: 6(4.572,33.147) 6(44.323,4.318)

## Via types
v1: diameter 1.27, hole 0.711, Top Layer to Bottom Layer, 69 vias

## Nets (pads, with @x,y where several pads share a name; then routed paths per layer and width w, separated by ;. In a path a pad name is that pad's centre, name@x,y a point inside that pad or via, vN(x,y) a via of type N, cw(c..) or ccw(c..) an arc to the next point about the centre after c; other vN are vias at no path point)
12V: C1.2 Car.2 Throttle.2 U1.1
+5V: C2.2 C3.1 C5.2 C6.2 C7.2 C8.2 C13.2 C14.2 JTAG1.4 JTAG1.7 L1.2 R1.1 R20.1 U1.3 U2.2 U3.21 U3.52 U4.3 | length 34.7
  Top Layer w0.254: R20.1 3.657,13.415 3.93,13.142 4.03,13.142 4.599,12.573 v1(6.604,12.573) 6.604,12.848 6.986,13.23 C14.2 6.858,14.479 C13.2 6.543,16.514 U4.3 ; L1.2 11.732,28.107 12.994,29.369 13.163,29.369 C5.2 ; v1(13.462,31.242) 13.462,29.716 C5.2 ; C2.2 14.732,21.171 15.405,21.844 v1(17.272,21.844) ; C8.2 C5.2 ; U3.21 26.086,10.16 26.086,10.902 27.178,11.994 28.123,11.994 v1(28.194,12.065) ; U3.52 32.268,25.365 32.268,26.391 32.131,26.528 R1.1 32.281,27.244 U2.2 34.679,27.244 35.821,26.102 36.128,26.102 v1(36.322,25.908) ; v1(38.989,10.033) 39.813,9.209 C3.1
+8,3V: Car.3 Relay1.3
APPS_1: Car.5 R6.1 | length 20.7
  Top Layer w0.254: v1(20.447,30.988) 22.352,29.083 R6.1
  Int1 w0.254: Car.5 10.597,32.766 18.669,32.766 v1(20.447,30.988)
APPS_2: Car.4 R5.1 | length 16.6
  Top Layer w0.254: v1(21.971,30.988) 21.971,30.723 22.452,30.242 24.46,30.242 25.011,29.691 25.011,29.232 25.16,29.083 R5.1
  Int1 w0.254: Car.4 21.971,33.392 v1(21.971,30.988)
CAN_H: Car.7 R23.2 U4.7 | length 20.4
  Top Layer w0.254: R23.2 4.964,25.389 5.119,25.234 ; R23.2@4.191,25.527 R23.2@4.191,25.577 ; U4.7 5.273,25.08 5.119,25.234 ; Car.7 13.716,35.647 13.716,34.377 9.565,30.226 6.731,30.226 5.588,29.083 5.588,25.704 5.119,25.234
CAN_L: Car.8 R21.1 U4.6 | length 20.4
  Top Layer w0.254: U4.6 6.543,25.085 6.659,25.201 ; R21.1 6.775,25.317 6.659,25.201 ; Car.8 15.612,35.555 9.775,29.718 6.985,29.718 6.096,28.829 6.096,25.764 6.659,25.201
ETC_CTRL: D1.1 U3.2 | length 23.4
  Top Layer w0.254: D1.1 14.431,33.655 11.049,30.273 11.049,28.963 10.801,28.715 10.801,25.267 12.128,23.94 14.7,23.94 15.779,22.86 U3.2
ETC_OUT: Car.6 R7.1 | length 2
  Top Layer w0.254: R7.1 9.612,35.023 Car.6
GND: C1.1 C2.1 C3.2 C4.2 C5.1 C6.1 C7.1 C8.1 C9.2 C10.2 C11.2 C13.1 C14.1 C15.2 Car.1 CCTRL1.1 Fehler1.1 Heart1.1 JTAG1.2 JTAG1.10 pad.6 PWR1.1 R24.1 Throttle.1 U1.2 U2.3 U3.22 U3.53 U3.63 U4.2
  other v1: 6,3 9,3 12,3 18,3 7.5,6 10.5,6 13.5,6 16.5,6 19.5,6 28.5,6 18,9 21,9 36,9 45,9 16.5,12 40.5,12 43.5,12 46.5,12 9,15 12,15 18,15 24,15 27,15 10.5,18 13.5,18 16.5,18 25.5,18 31.5,18 46.5,18 45,21 46.5,24 18,27 42,27 45,27 46.5,30 36,33 22.5,36 3,39 18,39 21,39 31.5,42 3,45 6,45
JTAG_TCK: JTAG1.1 U3.57 | length 21.5
  Top Layer w0.254: U3.57 28.346,23.724 v1(32.512,19.558)
  Int1 w0.254: v1(32.512,19.558) 38.673,13.397 41.469,13.397 42.102,14.03 42.102,14.1 42.48,14.478 JTAG1.1
JTAG_TDI: JTAG1.9 U3.54 | length 14.5
  Top Layer w0.254: U3.54 30.886,25.146 30.886,24.404 31.135,24.155 31.783,24.155 35.351,24.155 35.478,24.282 38.111,24.282 38.836,23.557 42.48,23.557 JTAG1.9
JTAG_TDO: JTAG1.3 U3.55 | length 17.5
  Top Layer w0.254: U3.55 30.074,25.146 30.074,24.429 31.643,22.86 v1(34.163,22.86)
  Int1 w0.254: v1(34.163,22.86) 38.546,18.477 42.102,18.477 JTAG1.3
JTAG_TMS: JTAG1.5 U3.56 | length 23.7
  Top Layer w0.254: U3.56 29.286,25.146 29.286,24.404 32.354,21.336 v1(33.401,21.336)
  Int1 w0.254: v1(33.401,21.336) 39.116,15.621 43.693,15.621 44.642,16.57 44.642,17.466 43.631,18.477 43.631,19.488 JTAG1.5
NetC4_1: C4.1 U3.23 Y1.1 | length 8.7
  Top Layer w0.254: Y1.1 25.709,4.52 25.76,4.572 25.887,4.699 27.03,5.842 27.404,5.842 27.404,6.604 27.116,6.604 C4.1 27.116,8.228 27.559,8.671 U3.23
NetC9_1: C9.1 U3.24 Y1.2 | length 8.7
  Top Layer w0.254: U3.24 28.346,8.773 28.891,8.228 C9.1 28.891,8.028 30.836,6.083 30.836,5.393 31.709,4.52 Y1.2
NetC10_1: C10.1 C11.1 L1.1 R2.2 U3.64 | length 13
  Top Layer w0.254: L1.1 11.732,26.757 12.54,25.949 12.54,25.945 13.025,25.461 13.163,25.461 C10.1 17.38,25.138 R2.2 18.158,25.146 18.307,24.997 18.307,24.538 18.53,24.315 22.283,24.315 22.758,24.79 U3.64
NetC12_1: C12.1 R21.2 R22.2 R23.1 | length 10.5
  Top Layer w0.254: R23.1 4.318,27.316 v1(4.318,28.829) ; v1(7.493,28.702) 7.493,27.218 R21.2 7.594,27.067 7.974,26.687 C12.1 9.427,26.658 R22.2 ; C12.1@9.525,27.068 C12.1@9.546,27.047
  Int1 w0.254: v1(4.318,28.829) 4.381,28.765 7.429,28.765 v1(7.493,28.702)
NetC15_1: C15.1 R2.1 U3.62 | length 7.5
  Top Layer w0.254: R2.1 19.238,25.146 19.561,25.469 19.561,25.948 20.778,27.165 C15.1 22.192,27.165 22.705,26.652 23.696,26.652 24.232,26.117 24.232,25.4 U3.62
NetCCTRL1_2: CCTRL1.2 R24.2 U4.8 | length 5.6
  Top Layer w0.254: R24.2 1.778,21.555 CCTRL1.2 1.965,21.368 2.88,22.282 3.851,22.282 4.003,22.434 U4.8
NetD1_2: D1.2 R18.1 | length 3.5
  Top Layer w0.254: D1.2 21.03,33.655 21.844,34.469 R18.1
NetFehler1_2: Fehler1.2 R9.2 | length 1.7
  Top Layer w0.254: Fehler1.2 R9.2
NetHeart1_2: Heart1.2 R10.2 | length 1.8
  Top Layer w0.254: Heart1.2 40.259,5.323 R10.2
NetPWR1_2: PWR1.2 R20.2 | length 2.4
  Top Layer w0.254: PWR1.2 1.994,13.678 R20.2
NetR3_2: R3.2 U3.58 | length 3.5
  Top Layer w0.254: U3.58 27.686,25.4 27.686,26.142 28.158,26.614 28.687,26.614 29.594,27.521 R3.2
NetR4_2: R4.2 U3.59 | length 2.6
  Top Layer w0.254: U3.59 26.873,25.4 26.873,26.117 27.366,26.609 27.366,27.122 27.689,27.445 R4.2
NetR5_2: R5.2 U3.60 | length 2.2
  Top Layer w0.254: R5.2 25.959,27.458 U3.60
NetR6_2: R6.2 U3.61 | length 2.7
  Top Layer w0.254: R6.2 24.18,27.483 25.146,26.517 U3.61
NetR7_2: R7.2 U3.3 | length 21.6
  Top Layer w0.254: R7.2 v1(12.7,34.798) ; U3.3 21.158,22.073 23.851,22.073 v1(23.876,22.098)
  Bottom Layer w0.254: v1(12.7,34.798) 23.876,23.622 v1(23.876,22.098)
NetR8_2: R8.2 U3.4 | length 23.2
  Top Layer w0.254: U3.4 23.277,21.26 23.455,21.082 v1(27.559,21.082) ; v1(29.718,34.671) 31.739,34.671 R8.2
  Bottom Layer w0.254: v1(27.559,21.082) 29.718,23.241 v1(29.718,34.671)
NetR9_1: R9.1 U3.35 | length 7.5
  Top Layer w0.254: U3.35 36.5,13.132 37.216,13.132 37.49,12.858 37.49,11.247 37.463,11.219 R9.1
NetR10_1: R10.1 U3.37 | length 10.8
  Top Layer w0.254: U3.37 36.5,14.732 37.216,14.732 37.998,13.95 37.998,11.036 37.973,11.011 37.973,8.945 39.305,7.613 40.237,7.613 40.386,7.464 R10.1
NetR17_1: R17.1 T1.3 | length 4.6
  Top Layer w0.254: T1.3 29.538,33.452 30.988,32.002 R17.1
NetR17_2: R17.2 Relay1.1 | length 6
  Top Layer w0.254: R17.2 37.529,31.877 38.002,32.35 Relay1.1
NetR18_2: R18.2 T1.1 | length 2.2
  Top Layer w0.254: R18.2 25.02,34.544 T1.1
NetR19_1: R19.1 T1.2 | length 1.8
  Top Layer w0.254: T1.2 25.162,31.064 R19.1
NetR19_2: R19.2 Relay1.2 | length 15.6
  Top Layer w0.254: R19.2 27.512,31.16 27.994,31.16 28.281,31.447 29.554,31.447 30.782,30.219 38.76,30.219 39.229,30.688 39.229,32.627 Relay1.2
NetR22_1: R22.1 U4.5 | length 1.7
  Top Layer w0.254: U4.5 7.951,23.008 R22.1
RST: JTAG1.6 R1.2 U2.1 U3.20 | length 37.1
  Top Layer w0.254: U3.20 25.273,10.16 25.273,10.877 31.16,16.764 v1(32.639,16.764) ; R1.2 32.281,29.144 U2.1 37.891,29.144 38.333,28.702 v1(38.608,28.702)
  Int2 w0.254: v1(32.639,16.764) 38.227,16.764 JTAG1.6 38.608,21.971 v1(38.608,28.702)
RX_CAN: U3.31 U4.4 | length 35
  Top Layer w0.254: U4.4 7.844,18.451 7.844,20.494 8.439,21.089 v1(8.439,21.336) ; U3.31 33.998,10.071 33.998,12.662 v1(34.036,12.7)
  Bottom Layer w0.254: v1(8.439,21.336) 16.343,21.336 16.851,20.828 25.908,20.828 v1(34.036,12.7)
Servo_CTRL: R8.1 Throttle.3 | length 6.1
  Top Layer w0.254: Throttle.3 33.666,37.453 R8.1
Servo_VCC: Relay1.4 Relay1.5 Throttle.6 | length 23.9
  Top Layer w0.254: Relay1.4@43.053,33.051 Relay1.4 ; Relay1.5@44.704,33.002 Relay1.5
  Top Layer w1: v1(43.053,29.337) Relay1.4@43.053,33.051 ; v1(44.704,29.337) Relay1.5@44.704,33.002
  Bottom Layer w1: Throttle.6 35.671,36.719 v1(43.053,29.337) v1(44.704,29.337)
TPS_1: R4.1 Throttle.4 | length 9.1
  Top Layer w0.254: Throttle.4 26.27,35.849 26.27,30.236 26.815,29.691 26.815,29.194 26.964,29.045 R4.1
TPS_2: R3.1 Throttle.5 | length 8.3
  Top Layer w0.254: v1(28.702,30.431) 29.025,30.431 29.644,29.813 R3.1
  Int1 w0.254: Throttle.5 28.4,31.192 28.572,31.02 28.572,30.561 v1(28.702,30.431)
TX_CAN: U3.30 U4.1 | length 36.5
  Top Layer w0.254: v1(3.937,20.32) 3.97,20.287 3.97,18.454 U4.1 ; v1(32.385,12.7) 33.147,11.938 U3.30
  Bottom Layer w0.254: v1(3.937,20.32) 24.765,20.32 v1(32.385,12.7)
pads on no net: C12.2 Car. JTAG1.8 Throttle. U3.1 U3.5 U3.6 U3.7 U3.8 U3.9 U3.10 U3.11 U3.12 U3.13 U3.14 U3.15 U3.16 U3.17 U3.18 U3.19 U3.25 U3.26 U3.27 U3.28 U3.29 U3.32 U3.33 U3.34 U3.36 U3.38 U3.39 U3.40 U3.41 U3.42 U3.43 U3.44 U3.45 U3.46 U3.47 U3.48 U3.49 U3.50 U3.51

## Polygon pours and split planes (outlines as drawn)
GND on Top Layer "GND_L01_P017" (solid, pour order 17): 0,48.895 0,0 48.26,0 48.26,48.895
+8,3V on Top Layer "8,3V" (solid, pour order 0): 33.909,45.085 35.052,43.942 35.052,36.449 48.133,36.449 48.26,36.576 48.26,48.895 11.049,48.895 10.928,39.491 12.065,38.354 13.335,38.354 14.224,39.243 14.224,40.513 18.796,45.085
GND on Bottom Layer "GND_L04_P014" (solid, pour order 14): 0,48.977 0,0.082 48.26,0.082 48.26,48.977
12V on Bottom Layer "12V" (solid, pour order 3): 26.289,41.275 26.67,40.894 26.67,38.735 27.178,38.227 29.337,38.227 29.718,38.608 29.718,40.259 25.781,44.196 0.762,44.196 0,43.434 0,7.366 1.778,7.366 15.875,7.366 16.637,8.128 16.637,9.779 15.24,11.176 2.427,11.176 1.789,10.459 1.905,41.783 2.032,41.91 2.413,42.418 6.477,42.418 7.874,41.021 7.874,40.64 7.874,38.608 8.255,38.227 10.795,38.227 11.176,38.608 11.176,40.894 11.557,41.275
GND on Int1 "GND_L02_P001" (solid, pour order 1): 0,48.895 0,0 48.26,0 48.26,48.895
+5V on Int2 "5V Plane" (solid, pour order 2): 0,48.977 0,0.082 48.26,0.082 48.26,48.977

## Other copper
Top Layer:
  pour cut-out: 46.482,31.394 48.26,31.394 48.26,36.22 46.482,36.22
  text "1" at 46.759,31.798 h1
Int1:
  pour cut-out: 46.482,31.394 48.26,31.394 48.26,36.22 46.482,36.22
  text "2" at 47.14,32.433 h1
Int2:
  pour cut-out: 46.482,31.369 48.26,31.369 48.26,36.195 46.482,36.195
  text "3" at 46.632,33.703 h1
Bottom Layer:
  pour cut-out: 46.482,31.369 48.26,31.369 48.26,36.195 46.482,36.195
  text "4" at 47.14,34.719 h1

## Text inside footprints (layer, text, board x,y; h text height)
C1: Top Overlay "+" at 16.004,12.25 h0.9 r90
C2: Top Overlay "+" at 15.232,22.868 h0.9 r90